# Altium PCB 电机参数系统测试.PcbDoc (part 2 of 2)
Units mil, origin at the board's own origin, x right, y up, seen from the top; angles counter-clockwise.
Board outline 5118.11 x 3258.06 mil, 2 copper layers (Top Layer, Bottom Layer); 172 components, 153 nets, 639 pads, 287 vias.
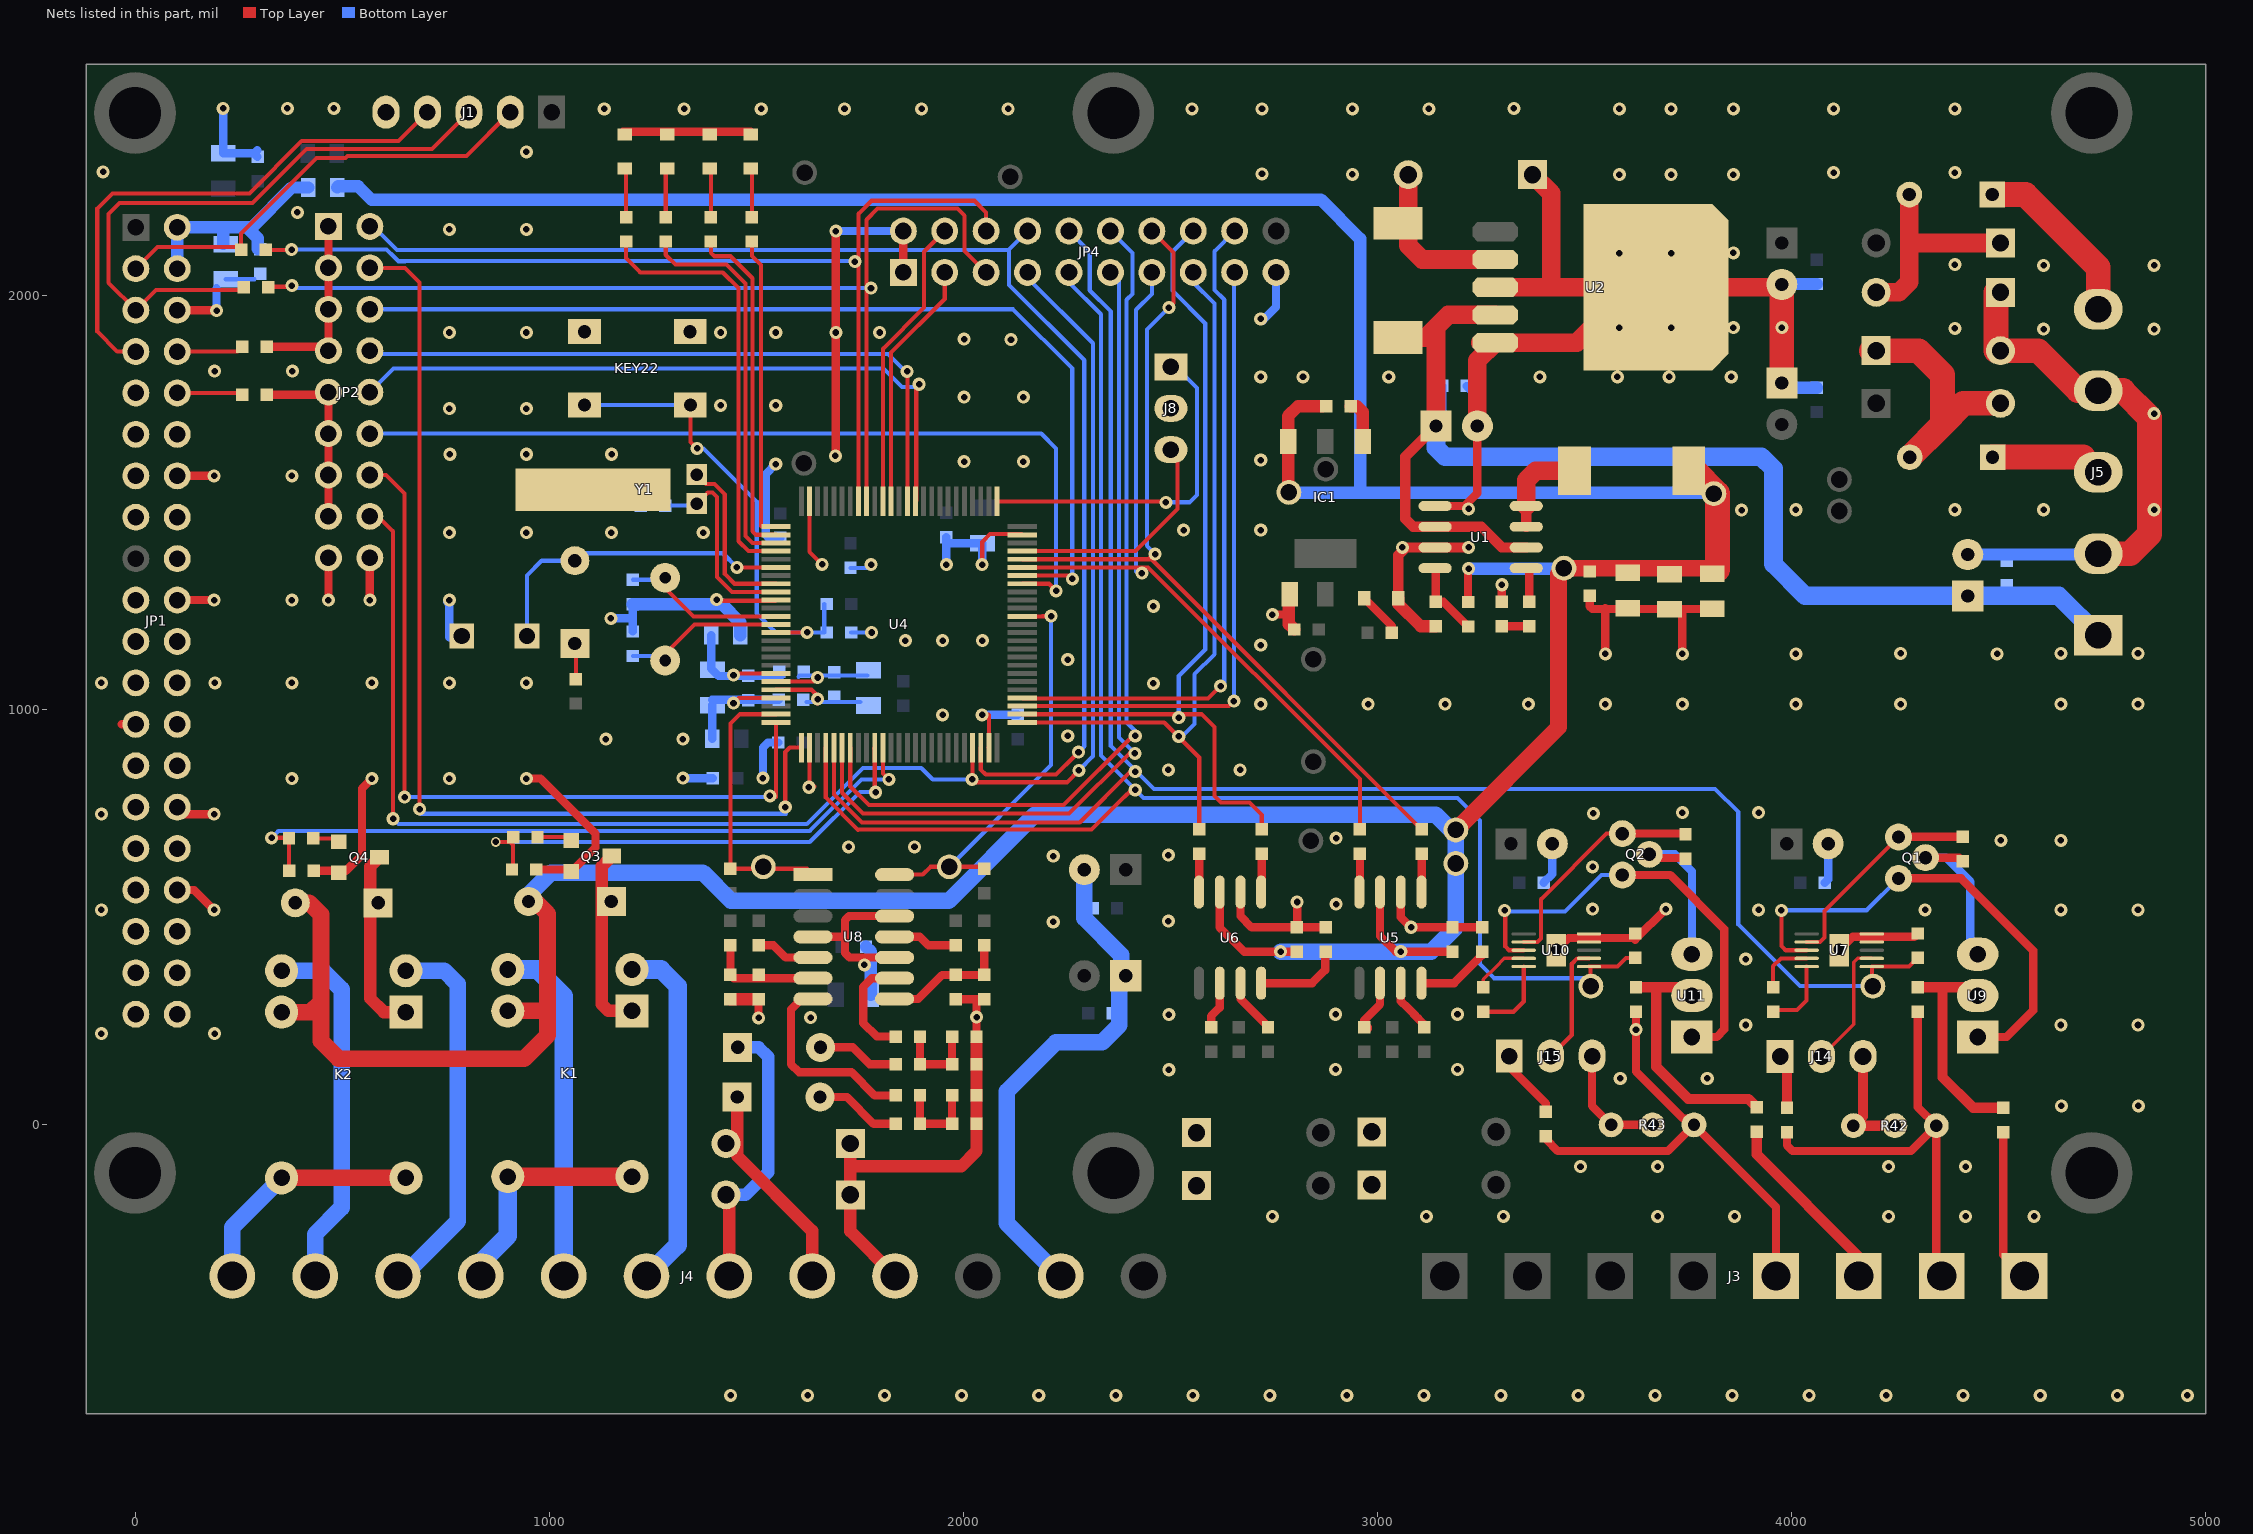
[diagram p2: the nets of this part, all layers, seen from the top]

## Via types
v1: diameter 31.5, hole 15.75, Top Layer to Bottom Layer, 286 vias
v2: diameter 23.62, hole 15.75, Top Layer to Bottom Layer, 1 vias

## Nets (pads, with @x,y where several pads share a name; then routed paths per layer and width w, separated by ;. In a path a pad name is that pad's centre, name@x,y a point inside that pad or via, vN(x,y) a via of type N, cw(c..) or ccw(c..) an arc to the next point about the centre after c; other vN are vias at no path point) (continued)
GND: BAT1.2 C1.2 C2.2 C3.2 C4.2 C5.2 C6.2 C7.2 C8.2 C9.2 C10.2 C11.2 C12.2 C13.2 C14.2 C15.2 C16.2 C17.2 C18.1 C19.1 C21.2 C22.2 C23.2 C24.2 C25.2 C26.2 C27.2 C28.2 C29.2 C30.2 C31.2 C32.1 C33.1 C35.2 C36.2 C37.2 C38.2 C39.2 C40.2 C41.2 C42.2 C62.2 C63.2 C64.2 C65.2 C74.2 C75.2 C91.1 C93.1 C96.2 C97.2 D1.1 D9.1 D10.1 D11.1 D12.1 D18.1 D20.1 D21.1 D22.2 D24.2 D27.2 D28.2 D29.2 D30.2 IC1.1 J1.5 J3.2 J3.4 J4.2 J4.4 J5.2 J5.4 J8.2 JP1.6 JP1.9 JP1.14 JP1.20 JP1.25 JP1.30 JP1.34 JP1.39 JP2.17 JP2.18 JP4.1 JP4.2 JP4.19 KEY22.1 LP4.1 Q3.1 Q4.1 R5.2 R42.1 R43.1 R72.1 R76.1 R85.1 R86.1 R88.1 R93.1 R94.1 R100.1 R115.2 R118.2 R158.2 U1.1 U1.3 U2.0 U2.3 U2.5 U4.10 U4.27 U4.49 U4.74 U4.99 U5.2 U6.2 U7.0 U7.9 U7.10 U8.4 U8.10 U8.12 U10.0 U10.9 U10.10 Y1.0 | length 16649.2
  Top Layer w10: v1(1404,1266) 1406.72,1263.28 1545.98,1263.28 U4.10@1547.76,1265.06 ; U4.27@1628.46,908.76 1628.46,826.54 v1@1640,815 ; U4.99@1628.46,1503.24 1628.46,1381.54 v1(1659,1351) ; v1(2045.5,1350.5) 2045.5,1405.5 2064.32,1424.31 2140.46,1424.31 U4.74@2142.24,1422.54 ; U4.49@2061,909.29 U4.49@2061.54,908.76 2061.54,987.46 v1@2061,988
  Top Layer w20: -32,965 JP1.25@2,965 ; JP1.34@102,565 143,565 v1(191,517) ; JP1.30@102,765 122,765 105,748 v1(191,748) ; JP1.20@102,1265 v1(191,1265) ; JP1.14@102,1565 v1(191,1565) ; JP1.6@102,1965 v1@191,1965 ; R118.2@431.24,611.44 509.43,611.44 548,650.01 548,810 v1(572,834) ; v1@467,1278 JP2.17@467,1367 ; v1@567,1278 JP2.18@567,1367 ; v1(945,834) 979,834 1111.58,701.43 1111.58,667.84 1058.18,614.44 R115.2@969.24,614.44 ; D30.2@1178,2396 D27.2@1487,2396 ; v1(1505.56,256.44) R93.1@1505.56,301 ; U8.4@1637,452 1714,452 ; v1(1691,1613) 1692,1614 v1(1692,1911) v1(1692,2156) ; v1(1761,384) 1763,386 1763,402 ; U8.10@1833.85,402 1763,402 ; U8.12@1833.85,502 1724,502 1714,492 1714,452 ; JP4.1@1855,2056 JP4.2@1855,2156 ; R85.1@1981.56,301 2029,301 ; 2029,298.24 2029,301 ; 2031.76,194 C16.2@2031.76,211 v1(2031.76,258) 2031.76,298.24 ; C13.2@2050.56,301 2029,301 ; U6.2@2669,560 2669,502 2696,475 C9.2@2805,475 R76.1@2875.44,475 ; v1(2746,1230) 2787.5,1230 ; C9.2@2806,476.44 v1@2806,535 ; U5.2@3056,560 3056,500 v1(3081,475) C8.2@3181,475 R72.1@3252.44,475 ; U1.1@3139,1492 3210,1492 3241,1523 C35.2@3241,1685 ; C3.2@3300,1260.76 v1(3300,1302) ; R100.1@3406.56,-29.76 3406.56,-36.56 3435,-65 3701,-65 R43.1@3764,-2 ; U10.0@3422,414.31 U10.0@3431.74,404.57 ; U10.0@3431.74,419.57 3461.17,449 3622,449 3622,445 v1(3696,519) ; C23.2@3512,1275 3512,1250 3518.5,1243.5 C62.2@3808,1243.5 ; v1(3550,1135) 3550,1245.5 ; C93.1@3624,271 v1(3624,228) 3624,126.9 3737.4,13.5 3748.5,13.5 R43.1@3764,-2 ; v1(3736,1135) 3736,1242.5 ; J3.4@3962.04,-367 3962.04,-200.04 R43.1@3764,-2 ; R88.1@3988.56,-19.76 3988.56,-51.56 4002,-65 4288,-65 R42.1@4349,-4 ; U7.0@4114.74,419.57 4147.17,452 4296,452 C17.2@4304,460 ; C91.1@4304,271 4304,41 R42.1@4349,-4 ; J3.2@4349,-353.96 R42.1@4349,-4 ; 1714,452 1714,413 1725,402 1763,402
  Top Layer w25: D24.2@3050,1269 3050,1373 3069,1392 U1.3@3139,1392 v1(3220,1392)
  Top Layer w30: C21.2@1437.56,301 R93.1@1505.56,301 ; D20.1@1727,-47 1727,-102 ; J4.4@1835.04,-367 1727,-258.96 D18.1@1727,-171 1727,-102 ; 2031.76,194 R86.1@2031.76,144.56 C22.2@2031.76,69 R94.1@2031.76,0.56 2031.76,-65.24 1995,-102 1727,-102 ; C64.2@2786,1292 2786,1207 C65.2@2799,1194 ; C63.2@2935,1733 2950,1733 2964,1719 IC1.1@2964,1648 ; D24.2@3050,1269 3050,1256 3104.24,1201.76 R5.2@3140.44,1201.76
  Top Layer w45: C35.2@3241,1685 3241,1843.37 U2.5@3284.12,1886.49 ; U2.5@3248.49,1886.49 U2.5@3284.12,1886.49 ; U2.3@3284.12,2020.35 3419,2020.35 ; D1.1@3374,2292 3419,2247 3419,2020.35 ; U2.0@3590.75,2020.35 U2.0@3591,2020.59 ; U2.0@3614.95,2020.59 U2.0@3768.5,2020.59 3969.59,2020.59 C30.2@3976,2027 ; U2.5@3284.12,1886.49 3480.85,1886.49 3614.71,2020.35 3419,2020.35
  Top Layer w60: C32.1@3976,1789 C30.2@3976,2027 ; D21.1@4493,2008 4493,1867 4595,1867 4691.45,1770.55 J5.4@4740,1770.55 4799.45,1770.55 4864,1706 4864,1424 4816.85,1376.85 J5.2@4740,1376.85
  Bottom Layer w10: C4.2@219,2039.5 C5.2@288.5,2039.5 ; R158.2@1727.56,1342.76 v1@1777.24,1342.76 ; C42.2@1729.24,1186.69 v1(1778.31,1186.69)
  Bottom Layer w20: v1(197,1964) 197,2017.5 ; v1(213,2452) C96.2@213,2343.5 C97.2@287.5,2343.5 ; 295,2351 C97.2@287.5,2343.5 ; C97.2@296,2335 C97.2@287.5,2343.5 ; v1@753.25,1261.09 v1@755.09,1259.25 ; BAT1.2@759,1175 v1@759,1259.94 ; v1@1149,1220 1150,1221 1202,1221 ; C41.2@1202,1189 1202,1221 ; C40.2@1202,1255 1202,1221 ; v1(1323,835) C28.2@1395,835 ; v1(1516,835) 1516,909 1528,921 C37.2@1553,921 ; 1523,1535 1523,1469 ; v1(1547,1593) 1523,1569 1523,1469 ; C7.2@1558,1415 1530,1415 1523,1422 1523,1469 ; v1(1692,2156) JP4.2@1855,2156 ; v1@1959,1348 C29.2@1959,1417 1959,1402 2045.5,1402 v1(2045.5,1350.5) ; v1@2061,988 C39.2@2131,988 ; v1@2722.5,1939.5 2755,1972 JP4.19@2755,2056 ; C36.2@3215,1782 3241,1756 C35.2@3241,1685 ; C24.2@3401,582.5 3422,603.5 C25.2@3422,676.5 ; C11.2@4080,582.5 4088,590.5 C12.2@4088,676.5
  Bottom Layer w30: C40.2@1202,1255 1417,1255 1461,1211 LP4.1@1461,1180.23 ; C75.2@1765,428 1776.5,416.5 C74.2@1776.5,312 ; C30.2@3977,2028 C31.2@4060,2028 ; C32.1@3987,1778 C33.1@4060,1778 ; C1.2@4425,1375 J5.2@4738.15,1375
  Bottom Layer w40: J4.2@2235.04,-367 2232,-367 2105,-240 2105,79 2223,197 2335,197 2376,238 2376,342 C18.1@2392,358 ; C14.2@2292,614 2292,497 2381,408 C18.1@2381,358
  other v1: 1438,-655 1624,-655 1810,-655 1996,-655 2182,-655 2368,-655 2554,-655 2740,-655 2926,-655 3112,-655 3298,-655 3484,-655 3670,-655 3856,-655 4042,-655 4228,-655 4414,-655 4600,-655 4786,-655 4955,-655 2746,-223 3118,-223 3304,-223 3676,-223 3862,-223 4234,-223 4420,-223 4585,-223 3490,-103 3676,-103 4234,-103 4420,-103 4651,44 4837,44 3586,110 3796,110 2496,131 2899,132 3193,132 -81,218 192,218 3889,239 4650,239 4836,239 1631,257 2496,264 2899,265 3193,265 3889,398 2217,488 2495,490 -81,517 3920,517 4322,517 4650,517 4836,517 3519,519 2900,531 2806,536 3519,621 2217,647 2495,649 1723,669 1882,669 4505,685 4650,685 2900,690 -81,748 3521,750 3736,752 3920,752 1627,813 379,834 759,834 2495,855 2668,855 1137,929 1323,929 2252,937 1950,988 2045.5,988 2718,1014 2977,1014 3163,1014 3364,1014 3550,1014 3736,1014 4010,1014 4263,1014 4650,1014 4836,1014 2459,1064 -81,1065 193,1065 379,1065 572,1065 759,1065 945,1065 2252,1121 4010,1135 4496,1135 4263,1136 4650,1136 4836,1136 2718,1156 1860,1167 1950,1167 2046,1167 1149,1221 2459,1250 379,1265 467,1265 567,1265 759,1265 1777.24,1350.5 1959,1350.5 3060,1392 759,1428 945,1428 1150,1428 1372,1428 2532,1434 2718,1434 3879,1482 4010,1483 4394,1483 4608,1483 4875,1483 3220,1485 379,1565 2002,1599 2145,1599 2718,1603 760,1617 945,1617 1151,1617 4875,1715 759,1727 945,1727 1414,1735 1547,1735 2002,1755 2145,1755 2718,1804 2820,1804 3027,1804 3392,1804 3579,1804 3704,1804 3854,1804 192,1818 380,1818 2115,1894 2002,1895 759,1911 945,1911 1414,1911 1547,1911 1798,1911 4608,1919 4875,1919 4394,1921 3584,1922 3709,1922 3859,1923 3976,1923 2718,1944 4608,2073 4875,2073 4394,2075 3584,2102 3709,2102 3859,2103 759,2160 945,2160 392,2201 3584,2292 3709,2292 3859,2292 2939,2293 2721,2294 4101,2297 4394,2297 -77,2299 945,2347 1133,2451 1326,2451 1512,2451 1713,2451 1899,2451 2108,2451 2552,2451 2721,2451 2939,2451 3124,2451 3584,2451 3709,2451 3859,2451 4101,2451 4394,2451 368,2452 480,2452 3329,2452
IOUT1: J3.1 R87.1 | length 368.6
  Top Layer w20: R87.1@4510.56,-19.76 4510.56,-315.52 J3.1@4562.04,-367
IOUT2: J3.3 R99.1 | length 403.4
  Top Layer w25: R99.1@3915.56,-18.76 3915.56,-73.56 J3.3@4162.04,-320.04
MOTOR_SIGN1: D17.1 D18.2 J4.6 | length 685.6
  Top Layer w30: D18.2@1427,-171 1435.04,-179.04 1435.04,-231.04 1435.04,-250 J4.6@1435.04,-367
  Bottom Layer w30: D18.2@1427,-171 1474,-171 1529,-116 1529,162 1506,185 D17.1@1455,185
MOTOR_SIGN2: D19.1 D20.2 J4.5 | length 507
  Top Layer w30: D19.1@1454,65 1454,-77 1635.04,-258.04 J4.5@1635.04,-367
NetC3_1: C3.1 R4.1 | length 66.6
  Top Layer w20: C3.1@3300,1201.76 R4.1@3366.56,1201.76
NetC4_1: C4.1 C5.1 JP1.2 JP1.4 LP2.1 | length 541.5
  Bottom Layer w30: JP1.4@102,2065 JP1.2@102,2151.5 ; JP1.2@102,2165 270,2165 ; C4.1@213,2125.5 213,2162 ; C5.1@296,2113 296,2139 270,2165 ; LP2.1@418,2261 378.23,2261 282.23,2165 270,2165
NetC13_1: C13.1 R79.1 R85.2 U8.8 | length 312
  Top Layer w20: U8.8@1833.85,302 1891,302 1949,360 R85.2@1981.56,360 C13.1@2050.56,360 R79.1@2050.56,431.24
NetC16_1: C16.1 R77.1 R78.2 R86.2 | length 210.4
  Top Layer w20: R78.2@1895.24,211 R77.1@1895.24,144.56 R86.2@1972.76,144.56 C16.1@1972.76,211
NetC20_1: C20.1 U7.4 | length 139.8
  Top Layer w10: C20.1@3955,330 3955,381 3973.88,399.88 U7.4@4036,399.88
NetC20_2: C20.2 U7.5 | length 155.7
  Top Layer w10: 3972,275 4013,275 4036,298 U7.5@4036,380.2
NetC21_1: C21.1 R91.1 R93.2 U8.6 | length 262.7
  Top Layer w20: C21.1@1437.56,360 R91.1@1437.56,431.24 ; C21.1@1445.56,352 U8.6@1637,352
NetC22_1: C22.1 R89.1 R90.2 R94.2 | length 214.4
  Top Layer w20: R90.2@1895.24,69 R89.1@1895.24,0.56 R94.2@1972.76,0.56 C22.1@1972.76,69
NetC91_2: C91.2 R87.2 U9.2 | length 563.4
  Top Layer w25: C91.2@4304,330 4429,330 U9.2@4449,310 ; 4364,299 4364,281 ; 4364,328 4364,281 ; R87.2@4510.56,39.24 4437.76,39.24 4364,113 4364,281
NetC92_1: C92.1 U10.4 | length 146.4
  Top Layer w8: C92.1@3255,330 3255,349 3285,379 ; 3290.88,384.88 3285,379 ; U10.4@3353,399.88 3305.88,399.88 3285,379
NetC92_2: C92.2 U10.5 | length 192.6
  Top Layer w10: C92.2@3255,271 3328,271 3353,296 U10.5@3353,380.2
NetC93_2: C93.2 R99.2 U11.2 | length 618.3
  Top Layer w25: C93.2@3624,330 3673,330 ; U11.2@3759,310 3739,330 3673,330 ; R99.2@3915.56,40.24 3895.3,60.5 3750.5,60.5 3673,138 3673,330
NetD1_2: D1.2 L2.1 U2.2 | length 395.1
  Top Layer w45: D1.2@3074,2292 3074,2121 3107.72,2087.28 U2.2@3284.12,2087.28
NetD6_2: D6.2 D22.1 R102.2 | length 587.9
  Top Layer w60: D22.1@4193,1867 4306,1867 4364,1809 4364,1689 ; R102.2@4285,1610 4364,1689 ; D6.2@4504,1740 4415,1740 4364,1689
NetD7_1: D7.1 D21.2 R103.2 | length 523.4
  Top Layer w45: D21.2@4193,2008 4259,2008 4284,2033 4284,2132 ; R103.2@4284,2244 4284,2132 ; D7.1@4493,2127 4289,2127 4284,2132
NetD13_1: D13.1 R39.2 | length 83.2
  Top Layer w10: R39.2@1064.56,1074.24 D13.1@1064.56,1157.44
NetD17_2: D17.2 R77.2 | length 198
  Top Layer w20: D17.2@1655,185 1733,185 1773.44,144.56 R77.2@1836.24,144.56
NetD19_2: D19.2 R89.2 | length 208.9
  Top Layer w20: D19.2@1654,65 1719,65 1783.44,0.56 R89.2@1836.24,0.56
NetD24_1: D24.1 R106.1 | length 110.1
  Top Layer w20: D24.1@2968,1269 3034.76,1202.24 R106.1@3034.76,1186.56
NetD25_1: D25.1 K1.4 Q3.3 | length 447.7
  Top Layer w30: Q3.3@1151.21,647 1127,622.79 1127,289 1143,273 K1.4@1200,273
NetD26_1: D26.1 K2.4 Q4.3 | length 449.9
  Top Layer w30: Q4.3@590.21,644 568,621.79 568,303 601,270 K2.4@654,270
NetD27_1: D27.1 R119.1 | length 114.7
  Top Layer w10: R119.1@1489.56,2189.76 D27.1@1489.56,2304.44
NetD28_1: D28.1 R120.1 | length 114.7
  Top Layer w10: R120.1@1390.56,2189.76 D28.1@1390.56,2304.44
NetD29_1: D29.1 R121.1 | length 113.7
  Top Layer w10: R121.1@1281.44,2189.76 D29.1@1281.44,2303.44
NetD30_1: D30.1 R122.1 | length 114.7
  Top Layer w10: R122.1@1185.56,2189.76 D30.1@1185.56,2304.44
NetJ5_3: J5.3 R102.1 | length 218.7
  Top Layer w60: R102.1@4485,1610 J5.3@4703.7,1610
NetJ5_5: J5.5 R103.1 | length 429.5
  Top Layer w60: R103.1@4484,2244 4564,2244 4740,2068 J5.5@4740,1967.4
NetJ14_1: J14.1 R88.2 | length 107.2
  Top Layer w25: R88.2@3988.56,39.24 J14.1@3988.56,146.44
NetJ14_2: J14.2 U7.7 | length 307.5
  Top Layer w8: J14.2@4072,163 4150,241 4150,391 4158.88,399.88 U7.7@4193.48,399.88
NetJ14_3: J14.3 R42.2 R42.3 | length 244
  Top Layer w25: R42.2@4149,-4 R42.3@4249,-4 ; 4172,19 J14.3@4172,163
NetJ15_1: J15.1 R100.2 | length 171.4
  Top Layer w20: J15.1@3318,164 3318,138 3406.56,49.44 R100.2@3406.56,29.24
NetJ15_2: J15.2 U10.7 | length 290.9
  Top Layer w10: J15.2@3418,164 3468.95,214.95 3468.95,386.8 3482.04,399.88 U10.7@3510.48,399.88
NetJ15_3: J15.3 R43.2 R43.3 | length 285.1
  Top Layer w20: J15.3@3518,164 3518,44 R43.2@3564,-2 R43.3@3664,-2
NetJP2_1: JP2.1 JP2.3 JP2.5 JP2.7 R11.2 | length 452.7
  Top Layer w20: R11.2@318.24,1876.44 457.56,1876.44 JP2.7@467,1867 JP2.5@467,1967 JP2.3@467,2067 JP2.1@467,2167
NetJP2_9: JP2.9 JP2.11 JP2.13 JP2.15 R12.2 | length 452.2
  Top Layer w10: JP2.9@465.44,1767 JP2.9@467,1767 ; JP2.15@466.44,1467.56 JP2.15@466.44,1490
  Top Layer w20: R12.2@318.24,1760.44 461.56,1760.44 JP2.9@467,1755 ; JP2.15@466.44,1490 467,1490.56 JP2.13@467,1567 JP2.11@467,1667 JP2.9@467,1755 ; JP2.9@467,1767 JP2.9@467,1755
NetL1_1: L1.1 U1.7 U1.8 | length 238
  Top Layer w25: U1.7@3359,1442 3359,1466 U1.8@3359,1492
  Top Layer w45: U1.8@3359,1492 3359,1554 3382.2,1577.2 L1.1@3475.41,1577.2
NetQ1_1: Q1.1 R81.2 U7.2 | length 518.9
  Top Layer w10: U7.2@4036,439.25 4068.25,439.25 4079.12,450.12 4079.12,514.12 Q1.1@4258,693
  Top Layer w20: Q1.1@4258.24,693.24 R81.2@4412.56,693.24
NetQ1_2: Q1.2 R81.1 U9.3 | length 407.7
  Top Layer w20: Q1.2@4323,643 4403.8,643 R81.1@4412.56,634.24
  Bottom Layer w20: Q1.2@4323,643 4373,643 4431,585 4431,428 U9.3@4449,410
NetQ1_3: Q1.3 U7.3 U9.1 | length 1168.8
  Top Layer w10: v1(3975,516) 3975,430 3980,425 3985.43,419.57 U7.3@4036,419.57
  Top Layer w20: Q1.3@4258,593 4409,593 4583,419 4583,274 4519,210 U9.1@4449,210
  Bottom Layer w10: v1(3975,516) 4181,516 Q1.3@4258,593
NetQ2_1: Q2.1 R96.2 U10.2 | length 554.7
  Top Layer w10: U10.2@3353,439.25 3386.25,439.25 3394.53,447.53 3394.53,542.53 3553,701 Q2.1@3591,701
  Top Layer w20: Q2.1@3591,701 3591.24,701.24 R96.2@3743.56,701.24
NetQ2_2: Q2.2 R96.1 U11.3 | length 411.2
  Top Layer w20: Q2.2@3656,651 3664.76,642.24 R96.1@3743.56,642.24
  Bottom Layer w20: Q2.2@3656,651 3718,651 3759,610 U11.3@3759,410
NetQ2_3: Q2.3 U10.3 U11.1 | length 1082.1
  Top Layer w10: v1@3307,513 3308.43,511.57 3308.43,428.57 3317.43,419.57 U10.3@3353,419.57
  Top Layer w20: Q2.3@3591,601 3707,601 3837,471 3837,228 3819,210 U11.1@3759,210
  Bottom Layer w10: v1@3307,513 3453,513 3541,601 Q2.3@3591,601
  other v1: 3307,516
NetQ3_2: Q3.2 R114.1 | length 72.9
  Top Layer w10: R114.1@971.76,692.56 Q3.2@1044.63,692.56
NetQ4_2: Q4.2 R117.1 | length 52.9
  Top Layer w10: R117.1@430.76,689.56 Q4.2@483.63,689.56
NetR1_1: R1.1 U8.5 | length 143.6
  Top Layer w20: R1.1@1505.56,431.24 1541.76,431.24 1571,402 U8.5@1637,402
NetR2_1: R2.1 U8.11 | length 156.3
  Top Layer w20: U8.11@1833.85,452 1895,452 1915.76,431.24 R2.1@1981.56,431.24
NetR3_1: R3.1 R5.1 U1.4 | length 182.6
  Top Layer w20: U1.4@3140.44,1340.56 R5.1@3140.44,1260.76 3159.04,1260.76 R3.1@3218.56,1201.24
NetR4_2: R4.2 U1.5 | length 73.7
  Top Layer w20: R4.2@3366.56,1260.76 U1.5@3366.56,1334.44
NetR69_1: R69.1 U5.7 | length 165
  Top Layer w20: U5.7@3056,340 3056,297 3073,280 ; 3098,255 3073,280 ; R69.1@3112.44,233.76 3112.44,240.56 3073,280
NetR71_1: R71.1 U5.6 | length 126
  Top Layer w20: R71.1@2967.44,233.76 2967.44,250.44 3006,289 U5.6@3006,340 ; R71.1@2977,230 R71.1@2977,233.76
NetR72_2: R72.2 U5.8 | length 182.9
  Top Layer w20: U5.8@3106,340 3185,340 3252.44,407.44 R72.2@3252.44,416
NetR73_1: R73.1 U6.7 | length 133.8
  Top Layer w20: U6.7@2669,340 2669,302 2735.44,235.56 R73.1@2735.44,233.76
NetR75_1: R75.1 U6.6 | length 114.8
  Top Layer w20: R75.1@2598.44,233.76 2598.44,260.44 2619,281 U6.6@2619,340
NetR76_2: R76.2 U6.8 | length 213.9
  Top Layer w20: U6.8@2719,340 2842,340 2873.44,371.44 R76.2@2873.44,414 ; R76.2@2873.44,415 R76.2@2873.44,414 ; R76.2@2875.44,416 R76.2@2873.44,414
NetR78_1: R78.1 U8.9 | length 263.5
  Top Layer w20: U8.9@1833.85,352 1779,352 1758,331 1758,244 1791,211 R78.1@1836.24,211
NetR90_1: R90.1 U8.7 | length 479.7
  Top Layer w20: U8.7@1637,302 1609,302 1584,277 1584,144 1603,125 1730,125 1786,69 R90.1@1836.24,69
NetR172_2: R172.2 U5.4 | length 90.8
  Top Layer w20: U5.4@2957.44,561.44 R172.2@2957.44,652.24
NetR174_1: R174.1 U5.1 | length 91.7
  Top Layer w20: U5.1@3106.56,560.56 R174.1@3106.56,652.24
NetR186_1: R186.1 U6.4 | length 91.7
  Top Layer w20: U6.4@2569.56,560.56 R186.1@2569.56,652.24
NetR187_1: R187.1 U6.1 | length 90.7
  Top Layer w20: U6.1@2720.56,561.56 R187.1@2720.56,652.24
OSC32_IN: U4.8 Y1.1 | length 413.4
  Top Layer w10: Y1.1@1356,1568 1379,1545 1399,1545 1424,1520 1424,1328 1447.57,1304.43 U4.8@1547.76,1304.43
OSC32_OUT: C27.1 U4.9 Y1.2 | length 493.6
  Top Layer w10: Y1.2@1356,1498 1383,1525 1394,1525 1405,1514 1405,1321 1441.26,1284.74 U4.9@1547.76,1284.74
  Bottom Layer w10: C27.1@1280,1493 1351,1493 Y1.2@1356,1498
OSC_IN: C40.1 U4.12 X1.1 | length 366.2
  Top Layer w10: X1.1@1282,1292 1348.32,1225.69 U4.12@1547.76,1225.69
  Bottom Layer w10: C40.1@1202,1314 X1.1@1275,1314
OSC_OUT: C41.1 U4.13 X1.2 | length 406.3
  Top Layer w10: X1.2@1282,1092 1282,1137 1351,1206 U4.13@1547.76,1206
  Bottom Layer w10: C41.1@1202,1130 X1.2@1269,1130
PA1: pad.9 R92.2 U4.24 U8.1 | length 675.3
  Top Layer w10: U4.24@1547.76,989.46 1460.46,989.46 1437.56,966.56 R92.2@1437.56,616.24 1622.76,616.24 U8.1@1637,602
PA2_TX2: JP2.14 U4.25 | length 1898.1
  Top Layer w10: JP2.14@567,1567 606,1567 650.76,1522.24 v1(650.76,789.24) ; v1@1547.76,789.24 U4.25@1547.76,969.78
  Bottom Layer w10: v1(650.76,789.24) v1@1533,789.24
  other v1: 1533,792
PA3_RX2: JP2.4 U4.26 | length 2465.7
  Top Layer w10: JP2.4@567,2067 652,2067 687,2032 v1(687,760) ; v1(1570,765) 1570,898 1580.76,908.76 U4.26@1608.78,908.76
  Bottom Layer w10: v1@689,749 1572,749
PA4: C26.1 JP4.9 pad.7 U4.29 U10.6 | length 3886.7
  Top Layer w10: U4.29@1667.83,908.76 1667.83,788.17 1746,710 1747,711 2309,711 2387.5,789.5 2388.5,789.5 v1@2405.69,806.69 ; pad.7@3514,352 3514,376.68 U10.6@3510.48,380.2 3579,380.2 3599.8,401 C26.1@3622,401
  Bottom Layer w10: JP4.9@2255,2056 2255,2032 2332,1955 2332,890 2435,787 3193,787 3247,733 3247,386 3281,352 pad.7@3514,352
  other v1: 2415,806.69
PA5: C17.1 JP4.10 pad.6 U4.30 U7.6 | length 4602.7
  Top Layer w10: U4.30@1687.52,908.76 1687.52,795.44 1754.96,728 2281,728 v1@2406,853 ; pad.6@4196,333 4193.48,335.52 U7.6@4193.48,380.2 4283.2,380.2 C17.1@4304,401
  Bottom Layer w10: JP4.10@2255,2156 2305,2106 2305,2013 2356,1962 2356,913 2460,809 3815,809 3871,753 3871,482 4020,333 pad.6@4196,333
  other v1: 2415,851
PA6: JP4.11 U4.31 | length 2082.5
  Top Layer w10: U4.31@1707.2,908.76 1707.2,799.8 1757.75,749.25 2255.25,749.25 2401,895 v1(2414,895)
  Bottom Layer w10: JP4.11@2355,2056 2376,2035 2376,933 v1(2414,895)
PA7: JP4.12 U4.32 | length 2121.6
  Top Layer w10: U4.32@1726.89,908.76 1726.89,815.11 1772,770 2242,770 2409,937 v1(2415,937)
  Bottom Layer w10: JP4.12@2355,2156 2408,2103 2408,2004 2394,1990 2394,970 v1@2421,943
PA9_TX1: JP2.12 U4.68 | length 2104.9
  Top Layer w10: U4.68@2142.24,1304.43 2206.57,1304.43 v1(2224,1287)
  Bottom Layer w10: JP2.12@567,1667 2188,1667 2224,1631 v1(2224,1287)
PA10_RX1: JP2.6 U4.69 | length 2387.3
  Top Layer w10: U4.69@2142.24,1324.11 2254.89,1324.11 v1(2263,1316)
  Bottom Layer w10: JP2.6@567,1967 2120,1967 2263,1824 v1(2263,1316)
PA11_CAN1->RX: JP4.13 R172.1 U4.70 | length 1886
  Top Layer w10: U4.70@2142.24,1343.8 2446.2,1343.8 2957.44,832.56 R172.1@2957.44,711.24
  Bottom Layer w10: v1@2417,1334 2417,1966 2455,2004 JP4.13@2455,2056
  other v1: 2431,1330
PA12_CAN1->TX: JP4.14 R174.2 U4.71 | length 2078.4
  Top Layer w10: U4.71@2142.24,1363.48 2450.48,1363.48 ; JP4.14@2455,2156 2507,2104 v1@2507,1982 ; v1(2463,1376) 2450.48,1363.48 ; R174.2@3106.56,711.24 2452.4,1365.4 2450.48,1367.32 2450.48,1363.48
  Bottom Layer w10: v1(2463,1376) 2443,1396 2443,1918 v1(2496,1971)
PB0: R114.2 R115.1 U4.35 | length 1151.1
  Top Layer w10: v2(870.94,681.06) 905.7,681.06 912.76,674 R115.1@912.76,616.96 ; U4.35@1784.17,906.98 U4.35@1785.94,908.76 v1@1785.94,814.06
  Bottom Layer w10: v2(870.94,681.06) 1629.06,681.06 1750,802 v1@1773,802
  other v1: 1788,801
PB1: R117.2 R118.1 U4.36 | length 1752.5
  Top Layer w10: v1(330,691) 370.32,691 R117.2@371.76,689.56 R118.1@371.76,611.93 ; U4.36@1805.63,908.76 1805.63,846.37 v1(1820,832)
  Bottom Layer w10: v1@331,690 v1(330,691) 346,707 1629,707 1754,832 v1(1820,832)
PB3: JP4.3 U4.89 | length 606.5
  Top Layer w10: U4.89@1825.32,1503.24 1825.32,1862.31 1955,1992 JP4.3@1955,2056
PB4: JP4.4 U4.90 | length 714.6
  Top Layer w10: U4.90@1805.63,1503.24 1805.63,1871.63 1905,1971 1905,2106 JP4.4@1955,2156
PB6: JP4.5 R10.1 U4.92 | length 2558.7
  Top Layer w10: R10.1@315.24,2021.56 376.56,2021.56 v1(379,2024) ; U4.92@1766.26,1503.24 1766.26,2183.26 1793,2210 1986,2210 2003,2193 2003,2108 JP4.5@2055,2056
  Bottom Layer w10: v1(379,2024) 385,2018 v1(1777,2018)
PB7: JP4.6 R9.1 U4.93 | length 2507
  Top Layer w10: R9.1@315.24,2110.56 v1@374.44,2110.56 ; v1@376.44,2112.56 v1(378,2111) ; U4.93@1746.57,1503.24 1746.57,2197.57 1778,2229 2027,2229 2055,2201 JP4.6@2055,2156
  Bottom Layer w10: v1(378,2111) 378.5,2111.5 607.46,2111.5 625.96,2093 ; 626,2093 636,2083 652,2083 653,2084 1736,2084 v1(1738,2082)
PB10_TX3: JP2.16 JP4.7 U4.47 | length 3856.2
  Top Layer w10: JP2.16@567,1467 587,1467 623,1431 v1(623,737) ; v1@2022.17,833.17 U4.47@2022.17,908.76 ; v1@2028,825 2250,825 v1(2279,854)
  Bottom Layer w10: v1(623,737) 636,724 1621.96,724 1757.71,859.75 1898.25,859.75 1926,832 v1(2021,832) ; JP4.7@2155,2056 2155,2043 2313,1885 2313,888 v1(2279,854)
PB11_RX3: JP2.2 JP4.8 U4.48 | length 3228.6
  Top Layer w10: JP2.2@567,2167 JP2.2@576,2167 ; U4.48@2041.85,908.76 2041.85,856.15 2054,844 2224,844 v1@2269,889
  Bottom Layer w10: JP2.2@576,2167 633,2110 2109,2110 2110.5,2111.5 ; JP4.8@2155,2156 2110.5,2111.5 ; v1(2278,898) 2292,912 2292,1844 2110.5,2025.5 2110.5,2111.5
PB12_CAN2->RX: JP4.15 R186.2 U4.51 | length 1817.8
  Top Layer w10: U4.51@2142.24,969.78 2485,969.78 2569.56,885.22 R186.2@2569.56,711.24
  Bottom Layer w10: v1(2520,936) 2528,936 2558,966 2558,1086 2606,1134 2606,1981 2555,2032 JP4.15@2555,2056
PB13_CAN2->TX: JP4.16 R187.2 U4.52 | length 2066.6
  Top Layer w10: U4.52@2142.24,989.46 2575,989.46 2606,958.46 2606,792 2622,776 2691,776 2720.56,746.44 R187.2@2720.56,711.24
  Bottom Layer w10: v1(2520,981) 2520,1082 2584,1146 2584,1933 2505,2012 2505,2106 JP4.16@2555,2156
PB14: JP4.17 U4.53 | length 1548.7
  Top Layer w10: U4.53@2142.24,1009.15 2641.15,1009.15 v1(2653,1021)
  Bottom Layer w10: v1(2653,1021) JP4.17@2653,2054
PB15: JP4.18 U4.54 | length 1624.9
  Top Layer w10: U4.54@2142.24,1028.83 2144.02,1027.06 2591.06,1027.06 v1(2621,1057)
  Bottom Layer w10: v1(2621,1057) 2630,1066 2630,1990 2606,2014 2606,2107 JP4.18@2655,2156
PC7: pad.8 R83.2 U4.64 U8.14 | length 1001.4
  Top Layer w10: U8.14@1833.85,602 1902,602 1921,621 R83.2@2050.56,621 ; U4.64@2142.24,1225.69 2191,1225.69 2191.32,1226 v1(2212,1226)
  Bottom Layer w10: pad.8@1966,621 2212,867 v1(2212,1226)
PD5_TX2: JP2.10 U4.86 | length 1665.7
  Top Layer w10: U4.86@1884.37,1503.24 1886.15,1505.02 1886.15,1783.15 v1@1896,1793
  Bottom Layer w10: JP2.10@567,1767 624,1824 1807,1824 1852,1779 1886,1779 v1(1893,1786)
PD6_RX2: JP2.8 U4.87 | length 1647.4
  Top Layer w10: v1(1864,1817) v1@1864.68,1816.31 ; U4.87@1864.68,1503.24 v1@1864.68,1816.31 ; v1@1864.68,1817 v1@1864.68,1816.31
  Bottom Layer w10: JP2.8@567,1867 575,1859 1432,1859 ; 1417,1859 1432,1859 ; v1(1864,1817) 1860,1817 1818,1859 1432,1859
PE2: R119.2 U4.1 | length 733.1
  Top Layer w10: R119.2@1489.56,2130.76 1489.56,2095.44 1511,2074 1511,1444 1512.78,1442.22 U4.1@1547.76,1442.22
PE3: R120.2 U4.2 | length 824.5
  Top Layer w10: R120.2@1390.56,2130.76 1390.56,2103.44 1399,2095 1438,2095 1491,2042 1491,1431 1499.46,1422.54 U4.2@1547.76,1422.54
PE4: R121.2 U4.3 | length 943.4
  Top Layer w10: R121.2@1281.44,2130.76 1281.44,2098.56 1305,2075 1428,2075 1474,2029 1474,1420 1491.15,1402.85 U4.3@1547.76,1402.85
PE5: R122.2 U4.4 | length 1053.4
  Top Layer w10: R122.2@1185.56,2130.76 1185.56,2090.44 1220,2056 1419,2056 1457,2018 1457,1407 1480.83,1383.17 U4.4@1547.76,1383.17
RELAY_COM0: J4.12 K2.1 | length 586.3
  Top Layer w40: K2.1@354,-130 K2.1@654,-130
  Bottom Layer w40: J4.12@235.04,-367 235.04,-248.96 K2.1@354,-130
RELAY_COM1: J4.9 K1.1 | length 566.9
  Top Layer w45: K1.1@900,-127 K1.1@1200,-127
  Bottom Layer w45: J4.9@835.04,-367 835.04,-334.96 900,-270 K1.1@900,-127
RELAY_KM0: J4.11 K2.3 | length 882.1
  Bottom Layer w40: K2.3@354,370 454,370 499,325 499,-202 435.04,-265.96 J4.11@435.04,-367
RELAY_KM1: J4.8 K1.3 | length 837.5
  Bottom Layer w45: K1.3@900,373 971,373 1035.04,308.96 J4.8@1035.04,-367
RELAY_KS0: J4.10 K2.2 | length 909.9
  Bottom Layer w40: J4.10@635.04,-367 647,-367 779,-235 779,338 747,370 K2.2@654,370
RELAY_KS1: J4.7 K1.2 | length 857.6
  Bottom Layer w45: K1.2@1200,373 1270,373 1310,333 1310,-292.04 J4.7@1235.04,-367
RESET: C42.1 KEY22.2 R116.1 U4.14 | length 1175.7
  Top Layer w10: KEY22.2@1341.04,1735.89 1341.04,1646.96 v1(1357,1631) ; U4.14@1547.76,1186.31 1622.32,1186.31 v1(1623,1187)
  Bottom Layer w10: KEY22.2@1085.13,1735.89 KEY22.2@1341.04,1735.89 ; v1(1357,1631) 1373,1631 1501,1503 1501,1233 1530,1204 ; 1519,1215 1530,1204 ; C42.1@1664,1186.69 1663.69,1187 v1(1623,1187) 1547,1187 1530,1204 ; C42.1@1664.24,1187.56 R116.1@1664.24,1255.56
SM_GCLK: J1.4 JP1.7 | length 1320.4
  Top Layer w10: JP1.7@2,1865 -43,1865 -91,1913 -91,2210 -54,2247 276.43,2247 402.43,2373 451,2373 ; 468,2373 451,2373 ; J1.4@706,2443 636,2373 451,2373
SM_GEN0: JP1.11
SM_GEN1: JP1.12
SM_GEN2: JP1.13
SM_GEN3: JP1.15
SM_GEN4: JP1.16
SM_GEN5: JP1.18
SM_GEN6: JP1.22
SM_GPIO5: JP1.29
SM_GPIO6: JP1.31
SM_GPIO12: JP1.32
SM_GPIO13: JP1.33
SM_GPIO16: JP1.36
SM_GPIO19: JP1.35
SM_GPIO20: JP1.38
SM_GPIO21: JP1.40
SM_GPIO26: JP1.37
SM_ID_SC: JP1.28
SM_ID_SD: JP1.27
SM_RXD0: JP1.10 R12.1 | length 159.1
  Top Layer w10: JP1.10@102,1765 254.68,1765 R12.1@259.24,1760.44
SM_SCL: J1.3 JP1.5 R10.2 | length 1550.9
  Top Layer w10: 178,2014 145,2014 ; R10.2@248.68,2014 145,2014 ; R10.2@254.68,2013 R10.2@262.24,2020.56 ; 526,2354 517,2354 ; J1.3@806,2443 717,2354 517,2354 ; 145,2014 51,2014 JP1.5@2,1965 -64,2031 -64,2197 -37,2224 284,2224 414,2354 517,2354
SM_SDA: J1.2 JP1.3 R9.2 | length 1089.2
  Top Layer w10: JP1.3@2,2065 54,2117 249.8,2117 R9.2@256.24,2110.56 256.24,2150.24 438,2332 508,2332 513,2337 800,2337 J1.2@906,2443
SM_SPI_CE0: JP1.24
SM_SPI_CE1: JP1.26
SM_SPI_MISO: JP1.21
SM_SPI_MOSI: JP1.19
SM_SPI_SCLK: JP1.23
SM_TXD0: JP1.8 R11.1 | length 162
  Top Layer w10: JP1.8@102,1865 247.8,1865 R11.1@259.24,1876.44
SWCLK: J8.1 U4.76 | length 829.6
  Top Layer w10: U4.76@2081.22,1503.24 2491.76,1503.24 2489.51,1501 v1(2489,1501)
  Bottom Layer w10: v1(2489,1501) 2546,1501 2564,1519 2564,1777 J8.1@2511,1830
SWDIO: J8.3 U4.72 | length 561.9
  Top Layer w10: U4.72@2142.24,1383.17 2415.17,1383.17 2517,1485 J8.3@2517,1630
VBAT: BAT1.1 D13.2 U4.6 | length 800.7
  Top Layer w10: v1(1453.2,1343.8) 1491,1343.8 ; 1474.2,1343.8 1491,1343.8 ; U4.6@1547.76,1343.8 1491,1343.8
  Bottom Layer w10: BAT1.1@946.32,1178.22 946.32,1324.31 982,1360 D13.2@1062,1360 1080,1378 1419,1378 v1(1453.2,1343.8)
VCC_12V: C1.1 C2.1 C35.1 C36.1 J5.1 L2.2 U1.2 U1.6 U2.4 | length 3126.5
  Top Layer w25: C35.1@3141,1685 3067,1611 3067,1461 3086,1442 U1.2@3139,1442 3250,1442 3300,1392 U1.6@3359,1392
  Top Layer w45: L2.2@3049.2,1899 3116.58,1899 3141,1923.42 ; C35.1@3141,1685 3141,1923.42 ; U2.4@3284.12,1953.42 3171,1953.42 3141,1923.42
  Bottom Layer w20: C35.1@3156,1700 C36.1@3156,1782
  Bottom Layer w45: C35.1@3141,1685 3141,1633 3162.75,1611.25 3926.75,1611.25 3956,1582 3956,1352 4033,1275 C1.1@4425,1275 4645,1275 J5.1@4740,1180
VDD5V: C8.1 C9.1 C10.1 C23.1 C38.1 C62.1 C63.1 D25.2 D26.2 IC1.3 K1.5 K2.5 L1.2 LP2.2 pad.2@2786,1525 pad.3@3812,1522 pad.4@3450,1342 pad.5 R3.2 U5.3 U6.3 | length 11394.2
  Top Layer w20: U6.3@2619,560 2619,475 2678,416 v1(2766,416) C9.1@2805,416 ; U5.3@3006,560 3006,454 v1@3044,416 ; v1(3056,416) C8.1@3181,416 ; pad.5@3186,713 pad.5@3189,710 ; R3.2@3218.56,1260.24 v1@3218.56,1331.44
  Top Layer w30: pad.2@2786,1525 2784,1527 IC1.3@2784,1648 2784,1709 2808,1733 C63.1@2867,1733 ; pad.4@3473,1339 3533,1339 ; C62.1@3797.5,1339 C62.1@3820.5,1339
  Top Layer w40: K2.5@354,270 424,270 449,295 ; D26.2@387,534 421,534 449,506 449,295 ; K1.5@900,273 979,273 ; D25.2@950,537 967,537 996,508 996,214 940,158 491,158 449,200 449,295 ; pad.5@3189,710 3436.94,957.94 3436.94,1328.94 pad.4@3450,1342 3794.5,1342 3797.5,1339 C62.1@3808,1328.5
  Top Layer w60: L1.2@3764,1579 3820.5,1522.5 C62.1@3820.5,1339
  Bottom Layer w30: LP2.2@488,2261 491,2264 539,2264 571.5,2231.5 2283.5,2231.5 2284,2232 2863,2232 2958,2137 2958,1524 ; pad.2@2783,1524 2958,1524 ; v1(3220,1341) pad.4@3465,1341 ; pad.3@3814,1524 2958,1524
  Bottom Layer w40: D25.2@950,537 950,553 1004,607 1371,607 1439,539 1965,539 2173,747 3140,747 3183,704 pad.5@3189,710 3189,476 3129,416 v1(3056,416) v1(2766,416)
VDDA: C34.1 C44.1 LP3.2 R14.1 U4.22 | length 350.5
  Top Layer w10: v1(1445,1016) 1457.83,1028.83 U4.22@1547.76,1028.83
  Bottom Layer w20: C34.1@1393.06,1024.56 R14.1@1554.24,1024.56 ; LP3.2@1394,930.23 C34.1@1394,1011.5
VREF+: C43.1 C45.1 R14.2 U4.21 | length 253.5
  Top Layer w10: U4.21@1547.76,1048.52 1633.48,1048.52 1648,1034 v1@1648,1016
  Bottom Layer w10: R14.2@1621.68,1019 C45.1@1685,1019 ; C45.1@1685.06,1019 C43.1@1751,1019
  other v1: 1648,1026
VREF-: C43.2 C45.2 R15.2 U4.20 | length 271.3
  Top Layer w10: U4.20@1547.76,1068.2 1638.2,1068.2 v1(1648,1078)
  Bottom Layer w10: R15.2@1602,1080 1604.5,1082.5 1648,1082.5 C43.2@1768,1082.5
VSSA: C34.2 C44.2 LP4.2 R15.1 U4.19 | length 360.8
  Top Layer w10: v1(1445,1084) 1448.89,1087.89 U4.19@1547.76,1087.89
  Bottom Layer w20: LP4.2@1391,1180.23 1391,1099.5 1408.94,1081.56 R15.1@1559.24,1081.56
pads on no net: U4.5 U4.7 U4.15 U4.16 U4.17 U4.18 U4.23 U4.33 U4.34 U4.38 U4.39 U4.40 U4.41 U4.42 U4.43 U4.44 U4.45 U4.46 U4.55 U4.56 U4.57 U4.58 U4.59 U4.60 U4.61 U4.62 U4.63 U4.65 U4.66 U4.67 U4.73 U4.77 U4.78 U4.79 U4.80 U4.81 U4.82 U4.83 U4.84 U4.85 U4.88 U4.91 U4.95 U4.96 U4.97 U4.98 U5.5 U6.5 U7.8 U8.2 U8.13 U10.8

## Polygon pours and split planes (outlines as drawn)
GND on Bottom Layer "Bottom Layer-No Net" (solid): -118.11,154 213,154 216,151 209,158 209,670 1297,670 1300,673 1395.94,673 1404,681.06 1404,-699 5000,-699 5000,2558.06 4999,2559.06 -118.11,2559.06
GND on Top Layer "Bottom Layer-No Net" (solid): -118.11,158 205,158 209,154 209,668 1390,668 1397,675 1406,666 1406,-699 5000,-699 5000,2558.06 -117.11,2558.06 -118.11,2559.06

## Keep-outs
Keep-Out Layer:
  lines w7.87: -118.11,2559.06 5000,2559.06 ; 5000,-575 5000,2558.06
  lines w10: -118.11,2559.06 -118.11,-699 5000,-699 5000,977

## Other copper
Top Layer:
  pour cut-out: 2914,1902 3181,1902 3184,1899 3184,2175 2913,2175 2911,2177
  pour cut-out: 3476,1714 3472,1710 3472,1441 3734,1441 3750,1457 3750,1712
Bottom Layer:
  pour cut-out: 3476,1717 3480,1713 3751,1713 3751,1439 3746,1444 3477,1444
  pour cut-out: 2913,2174 2917,2170 3188,2170 3188,1896 3183,1901 2914,1901

## Silkscreen, mask and mechanical layers (free items; w line width, h text height)
Top Overlay:
  lines w10: 4907,1465 5000,1465
  text "5" at 511,2430 h40
  text "1" at 1073,2430 h40
  text "1" at -6,2229 h45
  text "2" at 89,2229 h45
  text "GND" at 1877,2224 h45 r90
  text "PB4" at 1974,2224 h45 r90
  text "PB7" at 2066,2221 h45 r90
  text "PB11" at 2193,2219 h45 r90
  text "PA5" at 2284,2217 h45 r90
  text "PA13" at 2567,2217 h45 r90
  text "PA7" at 2381,2216 h45 r90
  text "PA12" at 2476,2216 h45 r90
  text "PB15" at 2664,2216 h45 r90
  text "3.3V" at 2779,2216 h45 r90
  text "RX3" at 634,2131 h30
  text "RX2" at 634,2040 h30
  text "RESET" at 1114,1962 h45
  text "RX1" at 634,1945 h30
  text "+15V" at 4989,1934 h50 r90
  text "RX0" at 634,1850 h30
  text "GND" at 1882,1840 h45 r90
  text "PB3" at 1975,1840 h45 r90
  text "PA4" at 2287,1840 h45 r90
  text "PA6" at 2369,1840 h45 r90
  text "PA11" at 2439,1840 h45 r90
  text "PB12" at 2610,1840 h45 r90
  text "PB14" at 2692,1840 h45 r90
  text "GND" at 2783,1840 h45 r90
  text "PB6" at 2076,1839 h45 r90
  text "PB10" at 2190,1835 h45 r90
  text "12V" at 2852,1835 h45
  text "SWCLK" at 2291,1793 h30
  text "TX0" at 634,1752 h30
  text "GND" at 4989,1742 h50 r90
  text "GND" at 2354,1697 h30
  text "TX1" at 634,1648 h30
  text "5V" at 3809,1601 h45
  text "SWDIO" at 2302,1594 h30
  text "TX2" at 634,1545 h30
  text "-15V" at 4989,1511 h50 r90
  text "TX3" at 634,1448 h30
  text "3.3V" at 2633,1356 h45
  text "GND" at 633,1347 h30
  text "GND" at 4986,1308 h50 r90
  text "+12V_OUT" at 4984,895 h50 r90
  text "PA1" at 1508,666 h60
  text "PC7" at 1964,663 h60
  text "PA4" at 3370,233 h60
  text "PA5" at 4052,229 h60
  text "39" at -42,149 h45
  text "40" at 71,147 h45
  text "C1_L" at 3112,-296.34 h40
  text "C1_H" at 3301,-296.34 h40
  text "C2_L" at 3504,-296.34 h40
  text "C2_H" at 3690,-296.34 h40
  text "COM2" at 171,-303 h40
  text "KM2" at 383,-303 h40
  text "KS2" at 582,-303 h40
  text "COM1" at 766,-303 h40
  text "KM1" at 980,-303 h40
  text "KS1" at 1189,-303 h40
  text "SING1" at 1352,-303 h40
  text "SING2" at 1562,-303 h40
  text "GND" at 1772,-303 h40
  text "-15V" at 1967,-303 h40
  text "GND" at 2185,-303 h40
  text "+15V" at 2381,-303 h40
  text "GND" at 3903,-303 h40
  text "IOUT2" at 4091,-303 h40
  text "GND" at 4309,-303 h40
  text "IOT1" at 4499,-303 h40

## Text inside footprints (layer, text, board x,y; h text height)
C1: Top Overlay "+" at 4450,1190 h50 r90
C12: Top Overlay "+" at 3903,651.5 h50
C14: Top Overlay "+" at 2477,639 h50 r180
C18: Top Overlay "+" at 2477,383 h50 r180
C25: Top Overlay "+" at 3237,651.5 h50
C30: Top Overlay "+" at 3951,2212 h50 r270
C32: Top Overlay "+" at 3951,1874 h50 r270
C35: Top Overlay "+" at 3056,1660 h50
Q1: Top Overlay "E" at 4308,743 h40 r270
Q2: Top Overlay "E" at 3641,751 h40 r270